# Allegro board AVRUSB500_2.brd
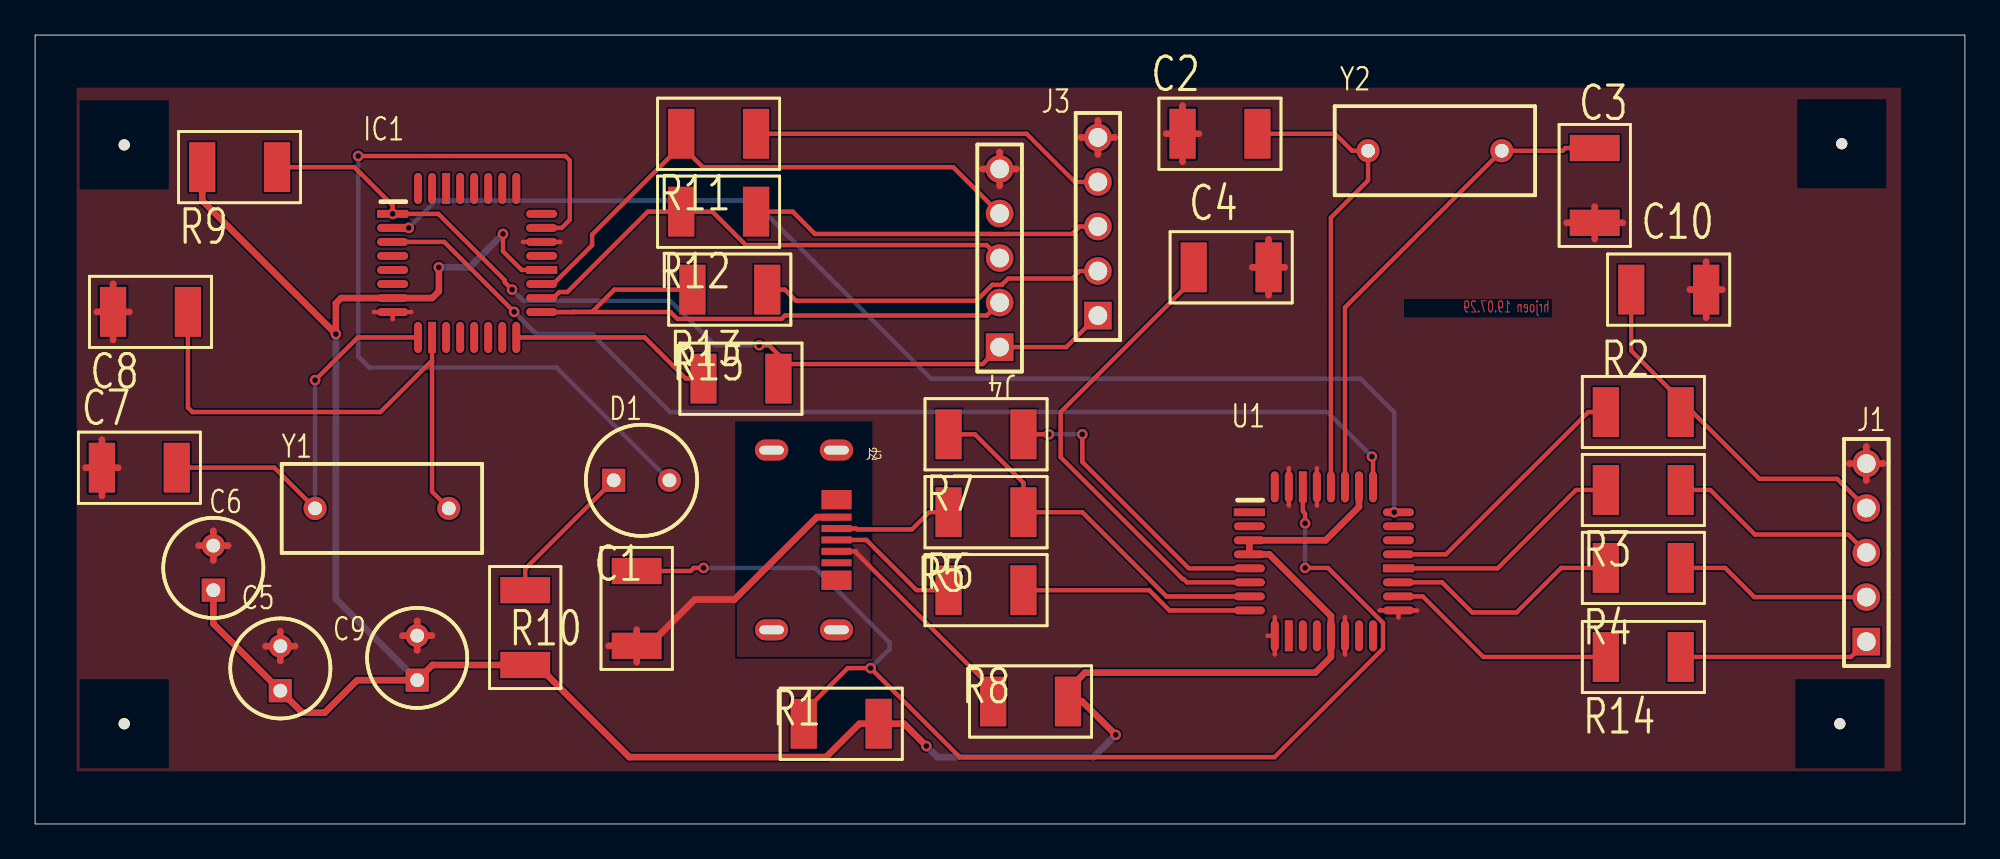
[diagram p0: board, top side]
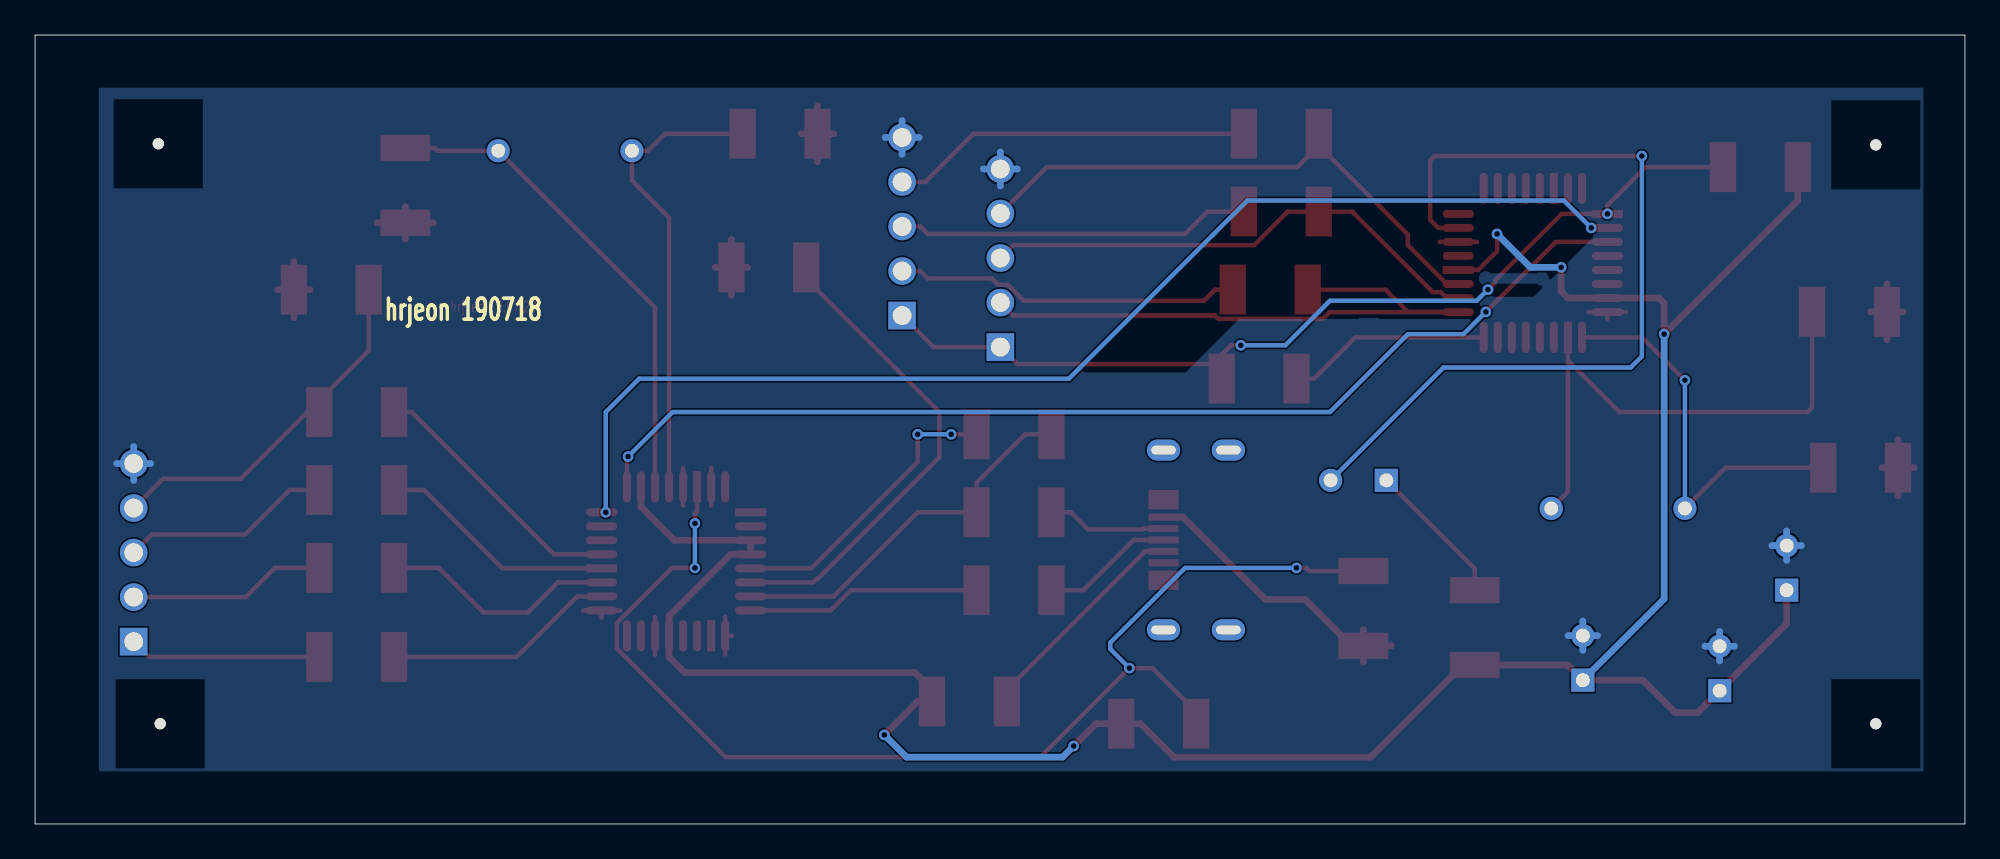
[diagram p1: board, bottom side, seen from below]

Outline 110 x 45 mm; copper layers: TOP, BOTTOM. Coordinates in mm from the lower left corner of the outline.
Outline path: 0,45 110,45 110,0 0,0 0,45

## Design rules (mm)
constraint set DEFAULT: min track width 0.254
net group POWERNETS: nets VCC

## Placement (name value [footprint] x y rotation side)
C1  47nF  [CPCYL1D225LS100031]  34.29 10.16 90 top
C2  27pF  [CPCYL1D225LS100031]  65.4 39.37 0 top
C3  27pF  [CPCYL1D225LS100031]  88.9 34.29 90 top
C4  47nF  [CPCYL1D225LS100031]  66.04 31.75 0 top
C5  100nF  [CPCYL1D225LS100031#2]  13.98 7.6 90 top
C6  1uF  [CPCYL1D225LS100031#2]  10.16 13.33 90 top
C7  100nF  [CPCYL1D225LS100031]  3.81 20.32 0 top
C8  100nF  [CPCYL1D225LS100031]  4.44 29.21 0 top
C9  100nF  [CPCYL1D225LS100031#2]  21.78 8.2 90 top
C10  22nF  [CPCYL1D225LS100031]  95.25 30.48 180 top
D1  LED  [CYLD250LS125031]  32.98 19.6 0 top
IC1  ATmega8  [QUAD80M32WG900]  20.38 34.8 270 top
J1  bbpg_Bitbang  [BLKCON100VHTM1SQSW1005]  104.38 10.4 90 top
J2  USBA  [MICRO_USB]  41.98 16.2 270 top
J3  avrusb500_out  [BLKCON100VHTM1SQSW1005]  60.58 29 90 top
J4  firmware_in  [BLKCON100VHTM1SQSW1005]  54.98 27.2 90 top
NOREF  -  [unnamed]  5.08 5.71 0 top
NOREF#2  -  [unnamed]  102.87 5.71 0 top
NOREF#3  -  [unnamed]  5.08 38.74 0 top
NOREF#4  -  [#2]  110 0 90 top
NOREF#5  -  [#2]  0 45 0 top
NOREF#6  -  [unnamed]  102.98 38.8 0 top
R1  470  [AX400X100031]  43.81 5.71 0 top
R2  220  [AX400X100031]  89.54 23.5 0 top
R3  220  [AX400X100031]  89.54 19.05 0 top
R4  220  [AX400X100031]  89.54 14.61 0 top
R5  27  [AX400X100031]  52.07 13.33 0 top
R6  27  [AX400X100031]  52.07 17.78 0 top
R7  1.5k  [AX400X100031]  52.07 22.23 0 top
R8  2.2  [AX400X100031]  54.61 6.99 0 top
R9  10k  [AX400X100031]  9.52 37.46 0 top
R10  470  [AX400X100031]  27.94 13.33 270 top
R11  1k  [AX400X100031]  36.83 39.37 0 top
R12  220  [AX400X100031]  36.83 34.93 0 top
R13  1k  [AX400X100031]  37.46 30.48 0 top
R14  220  [AX400X100031]  89.54 9.52 0 top
R15  220  [AX400X100031]  38.1 25.4 0 top
U1  FT232BM  [QUAD80M32WG900]  69.21 17.78 270 top
Y1  3.6864Mhz  [RAD450X200LS300031]  23.58 18 180 top
Y2  6Mhz  [RAD450X200LS300031]  75.98 38.4 0 top

## Library data of the parts
C1-C4 C7 C8 C10 = CAPACITOR NON-POL: alternate symbols: (SML2015)
C5 C9 = CAPACITOR NON-POL: alternate symbols: (SMDCAP)
C6 = CAPACITOR POL: alternate symbols: (SMDCAP)
D1 = LED
IC1 = ATmega8-DIL28_1
J1 J3 J4 = CON5
J2 = CON4_7
R1-R15 = R: alternate symbols: (SML2015)
U1 = FT232BM_2
Y1 Y2 = ZTA

## Footprints (pads in the part's own frame, mm; a bottom-side part is the same pattern mirrored in y, then rotated)
AX400X100031
  rect 1.499x2.845 smd: 1(0,0) 2(4.267,0)
BLKCON100VHTM1SQSW1005
  rect 1.575x1.575 hole 1.067: 1(0,0)
  round 1.575 hole 1.067: 2(2.54,0) 3(5.08,0) 4(7.62,0) 5(10.16,0)
CPCYL1D225LS100031
  rect 1.499x2.845 smd: 1(0,0) 2(4.267,0)
CPCYL1D225LS100031#2
  rect 1.321x1.321 hole 0.787: 1(0,0)
  round 1.321 hole 0.787: 2(2.54,0)
CYLD250LS125031
  rect 1.321x1.321 hole 0.787: 1(0,0)
  round 1.321 hole 0.787: 2(3.175,0)
MICRO_USB
  oval 1.2x1.9 hole 0.5x1.4: (-5.125,3.7) (-5.125,0) (5.125,3.7) (5.125,0)
  rect 1.1x1.72 smd: (-2.3,3.7) (2.3,3.7)
  rect 0.4x1.72 smd: 1(-1.3,3.7) 2(-0.65,3.7) 3(0,3.7) 4(0.65,3.7) 5(1.3,3.7)
QUAD80M32WG900
  rect 0.457x1.778 smd: 1(0,0) 20(3.2,8.496)
  oval 0.457x1.778 smd: 2(0.8,0) 3(1.6,0) 4(2.4,0) 5(3.2,0) 6(4,0) 7(4.801,0) 8(5.601,0) 17(5.601,8.496) 18(4.801,8.496) 19(4,8.496) 21(2.4,8.496) 22(1.6,8.496) 23(0.8,8.496) 24(0,8.496)
  oval 1.778x0.457 smd: 9(7.048,1.448) 11(7.048,3.048) 12(7.048,3.848) 13(7.048,4.648) 14(7.048,5.448) 15(7.048,6.248) 16(7.048,7.048) 25(-1.448,7.048) 26(-1.448,6.248) 27(-1.448,5.448) 28(-1.448,4.648) 29(-1.448,3.848) 31(-1.448,2.248) 32(-1.448,1.448)
  rect 1.778x0.457 smd: 10(7.048,2.248) 30(-1.448,3.048)
RAD450X200LS300031
  round 1.321 hole 0.787: 1(0,0) 2(7.62,0)
unnamed
  round 0.635 hole 3.175 unplated: (0,0)

## Nets
+5V: J2.4 R8.1
GND: C1.1 C2.1 C3.1 C4.2 C5.2 C6.2 C7.1 C8.1 C9.2 C10.1 IC1.8 IC1.22 J1.5 J2.1 J3.5 J4.5 U1.9 U1.14 U1.17 U1.29 U1.31
VCC: C5.1 C6.1 C9.1 IC1.7(VCC) IC1.20 R1.2 R8.2 R9.1 R10.2 U1.3 U1.4 U1.13 U1.26
BMISO: J1.3 R3.2
BMOSI: J1.2 R4.2
BRESET: J1.1 R14.2
BSCK: C10.2 J1.4 R2.2
D+: J2.2 R6.1
D-: J2.3 R5.1
F_MISO: IC1.18 J4.3 R12.1
F_MOSI: IC1.17 J4.2 R13.1
F_SCK: IC1.19 J4.4 R11.1
MISO: J3.3 R12.2
MOSI: J3.2 R13.2
RESET: IC1.1 J3.1 J4.1 R9.2 R15.2
RXD: IC1.2 U1.24
SCK: J3.4 R11.2
TXD: IC1.3 U1.25
N02483: R6.2 R7.1 U1.7
N02615: R5.2 U1.8
N03527: C4.1 U1.6
N06839: R2.1 U1.21
N06967: R3.1 U1.20
N07033: R4.1 U1.19
N07247: R14.1 U1.18
N11951: R7.2 U1.5
N15182: C7.2 IC1.9 Y1.2
N15289: C8.2 IC1.10 Y1.1
N19734: D1.2(CATHODE) IC1.23
N20572: D1.1 R10.1
N22544: IC1.16 R15.1
N41098: C3.2 U1.27 Y2.2
N41106: C2.2 U1.28(XTOUT) Y2.1
N49165: C1.2 R1.1 U1.30

Pads without a net: IC1 4 5 6 11 12 13 14 15 21 24 25 26 27 28 29 30 31 32; J2 5; U1 1 2 10 11 12 15 16 22 23 32

## Via types
v1: diameter 0.61, hole 0.33, TOP to BOTTOM, 20 vias

## Routing (per net, layer and track width the routed paths; a pad name or vN(x,y) marks a point on that pad's centre or on a via; arc(x,y) is an arc through that point)
+5V: length 12.9
  TOP w0.254: J2.4 46.79,15.55 46.79,15.47 54.61,7.66 R8.1
GND: length 107.7
  TOP w0.254: 73.06,20.3 U1.29 73.06,18.16 ; 70.66,9.67 70.66,10.73 ; 70.66,10.73 70.26,10.73 ; 70.66,10.73 70.66,11.8 ; IC1.8 21.45,29.2 ; IC1.8 20.38,28.79 ; IC1.8 19.31,29.2 ; 76.64,12.18 U1.17 ; U1.17 78.78,12.18 ; U1.17 77.71,11.77 ; 71.46,20.3 U1.31 71.46,18.16 ; 27.81,33.2 IC1.22 29.94,33.2 ; 74.66,11.8 U1.14 74.66,9.67
  TOP w0.381: J2.1 44.57,17.5 39.87,12.8 37.6,12.8 34.96,10.16 C1.1 ; C9.2 22.62,10.74 ; C9.2 21.78,11.58 ; C9.2 21.78,9.9 ; C9.2 20.94,10.74 ; 3.81,18.72 C7.1 ; C7.1 3.81,21.92 ; C7.1 2.88,20.32 ; C7.1 4.74,20.32 ; C3.1 88.9,35.22 ; C3.1 88.9,33.36 ; C3.1 90.5,34.29 ; C3.1 87.3,34.29 ; 3.52,29.21 C8.1 ; C8.1 4.44,27.61 ; C8.1 5.37,29.21 ; C8.1 4.44,30.81 ; C1.1 34.29,11.09 ; C1.1 32.69,10.16 ; C1.1 34.29,9.23 ; C6.2 11,15.88 ; C6.2 10.16,15.04 ; C6.2 10.16,16.71 ; C6.2 9.32,15.88 ; C2.1 65.4,40.97 ; C2.1 64.48,39.37 ; C2.1 65.4,37.77 ; C2.1 66.33,39.37 ; J1.5 104.38,21.53 ; J1.5 105.35,20.56 ; J1.5 103.41,20.56 ; J1.5 104.38,19.59 ; C5.2 13.98,10.98 ; C5.2 13.98,9.3 ; C5.2 13.14,10.14 ; C5.2 14.82,10.14 ; J4.5 54.98,38.33 ; J4.5 54.98,36.39 ; J4.5 54.01,37.36 ; J4.5 55.95,37.36 ; C4.2 71.23,31.75 ; C4.2 70.31,33.35 ; C4.2 69.38,31.75 ; C4.2 70.31,30.15 ; 95.25,28.88 C10.1 ; C10.1 95.25,32.08 ; C10.1 94.32,30.48 ; C10.1 96.18,30.48 ; 59.61,39.16 J3.5 ; J3.5 61.55,39.16 ; J3.5 60.58,40.13 ; J3.5 60.58,38.19
  BOTTOM w0.381: 104.38,19.59 J1.5 ; J1.5 104.38,21.53 ; J1.5 105.35,20.56 ; J1.5 103.41,20.56 ; C9.2 22.62,10.74 ; C9.2 21.78,11.58 ; C9.2 20.94,10.74 ; C9.2 21.78,9.9 ; J3.5 61.55,39.16 ; J3.5 59.61,39.16 ; J3.5 60.58,38.19 ; J3.5 60.58,40.13 ; 9.32,15.88 C6.2 ; C6.2 11,15.88 ; C6.2 10.16,15.04 ; C6.2 10.16,16.71 ; C5.2 14.82,10.14 ; C5.2 13.98,9.3 ; C5.2 13.14,10.14 ; C5.2 13.98,10.98 ; J4.5 54.98,38.33 ; J4.5 55.95,37.36 ; J4.5 54.01,37.36 ; J4.5 54.98,36.39
VCC: length 149.9
  TOP w0.254: v1(26.67,33.65) 26.67,32.66 27.73,31.6 IC1.20
  TOP w0.381: C6.1 10.16,11.42 C5.1 15.23,6.35 16.51,6.35 18.36,8.2 C9.1 22.65,9.07 R10.2 28.61,9.07 33.87,3.81 45.08,3.81 46.99,5.71 R1.2 49.53,5.71 v1(50.8,4.44) ; v1(61.59,5.08) 59.69,6.99 R8.2 58.88,7.66 59.85,8.63 72.97,8.63 73.86,9.53 U1.13 73.86,11.86 70.35,15.38 U1.4 U1.3 73.56,16.18 75.46,18.08 U1.26 ; v1(23.01,31.75) 23.01,30.38 22.63,30 IC1.7 17.45,30 17.14,29.7 v1(17.14,27.94) 9.52,35.56 R9.1
  BOTTOM w0.381: v1(23.01,31.75) 24.76,31.75 v1(26.67,33.65) ; v1(50.8,4.44) 51.44,3.81 60.32,3.81 v1(61.59,5.08) ; C9.1 17.14,12.83 v1(17.14,27.94)
BMISO: length 12.1
  TOP w0.254: J1.3 103.35,16.51 98.03,16.51 95.49,19.05 R3.2
BMOSI: length 11.3
  TOP w0.254: J1.2 98,12.94 96.33,14.61 R4.2
BRESET: length 10.9
  TOP w0.254: R14.2 103.5,9.52 J1.1
BSCK: length 21.3
  TOP w0.254: 93.8,24.17 R2.2 ; 93.8,24.17 98.29,19.69 102.71,19.69 J1.4 ; 93.8,24.17 90.98,26.99 C10.2
D+: length 6.8
  TOP w0.254: J2.2 46.79,16.85 46.84,16.8 49.98,16.8 50.96,17.78 R6.1
D-: length 7.6
  TOP w0.254: J2.3 47.38,16.2 50.25,13.33 R5.1
F_MISO: length 29.2
  TOP w0.254: IC1.18 29.54,30 29.88,30.34 30.34,30.34 34.93,34.93 R12.1 38.6,34.93 40.51,33.02 54.24,33.02 J4.3
F_MOSI: length 35.1
  TOP w0.254: 29.54,29.2 30.65,29.2 30.66,29.21 31.75,29.21 33.02,30.48 R13.1 ; 29.54,29.2 IC1.17 ; 29.54,29.2 31.98,29.2 36.21,29.2 36.61,28.8 42.55,28.8 42.75,29 54.24,29 J4.2
F_SCK: length 32
  TOP w0.254: R11.1 36.83,38.7 ; 36.83,38.7 38.06,37.46 52.33,37.46 J4.4 ; 36.83,38.7 31.75,33.62 31.75,33.01 29.54,30.8 IC1.19
MISO: length 20.2
  TOP w0.254: R12.2 43.18,34.93 44.45,33.65 54.49,33.65 54.5,33.65 55.46,33.65 55.47,33.65 59.11,33.65 59.54,34.08 J3.3
MOSI: length 19.8
  TOP w0.254: J3.2 59.54,31.54 59.11,31.12 55.47,31.12 55.11,30.75 54.56,30.75 53.65,29.85 43.37,29.85 42.74,30.48 R13.2
RESET: length 54.2
  TOP w0.254: v1(41.27,27.31) 41.83,27.31 42.37,26.77 42.37,26.07 ; R9.2 18.2,37.46 20.38,35.28 v1(20.38,34.8) 22.98,34.8 26.77,31.01 26.77,30.89 v1(27.19,30.48) ; J3.1 58.78,27.2 J4.1 54.01,26.23 42.53,26.23 42.37,26.07 ; 42.37,26.07 R15.2
  BOTTOM w0.254: v1(27.19,30.48) 27.82,29.85 36.19,29.85 38.73,27.31 v1(41.27,27.31)
RXD: length 68.4
  TOP w0.254: IC1.2 v1(21.3,34)
  BOTTOM w0.254: v1(21.3,34) 22.86,35.56 40.91,35.56 42.87,33.6 42.87,33.6 51.07,25.4 75.56,25.4 77.47,23.5 v1(77.47,17.78)
SCK: length 20.6
  TOP w0.254: J3.4 59.26,36.62 56.51,39.37 R11.2
TXD: length 62.6
  TOP w0.254: IC1.3 23.31,33.2 v1(27.31,29.21) ; v1(76.2,20.95) 76.26,20.89 U1.25
  BOTTOM w0.254: v1(76.2,20.95) 73.66,23.5 36.19,23.5 31.75,27.94 28.57,27.94 v1(27.31,29.21)
N02483: length 22
  TOP w0.254: U1.7 64.49,12.98 59.69,17.78 R6.2 56.34,19.46 53.57,22.23 R7.1
N02615: length 13.4
  TOP w0.254: R5.2 63.5,13.33 64.66,12.18 U1.8
N03527: length 27.7
  TOP w0.254: C4.1 66.04,31.08 58.46,23.5 58.46,20.92 65.4,13.97 65.47,13.97 65.66,13.78 U1.6
N06839: length 15.2
  TOP w0.254: U1.21 80.42,15.38 88.53,23.5 R2.1
N06967: length 13.7
  TOP w0.254: U1.20 83.36,14.58 87.83,19.05 R3.1
N07033: length 13.6
  TOP w0.254: R4.1 86.98,14.61 84.44,12.06 81.92,12.06 80.2,13.78 U1.19
N07247: length 13.3
  TOP w0.254: U1.18 79.1,12.98 82.55,9.52 R14.1
N11951: length 17
  TOP w0.254: v1(59.69,22.23) 59.69,20.65 65.76,14.58 U1.5 ; v1(57.78,22.23) R7.2
  BOTTOM w0.254: v1(59.69,22.23) v1(57.78,22.23)
N15182: length 23
  TOP w0.254: v1(15.96,25.31) 18.4,27.75 IC1.9 ; C7.2 13.64,20.32 Y1.2
  BOTTOM w0.254: Y1.2 v1(15.96,25.31)
N15289: length 30.8
  TOP w0.254: 22.63,26.44 19.69,23.5 8.97,23.5 8.71,23.75 C8.2 ; 22.63,26.44 IC1.10 ; 22.63,26.44 22.63,18.95 Y1.1
N19734: length 49.4
  TOP w0.254: v1(18.41,38.1) 30.23,38.1 30.48,37.85 30.48,34.46 30.02,34 IC1.23
  BOTTOM w0.254: D1.2 29.72,26.04 19.05,26.04 18.41,26.67 v1(18.41,38.1)
N20572: length 8.4
  TOP w0.254: R10.1 27.94,14.56 D1.1
N22544: length 11.6
  TOP w0.254: IC1.16 34.74,27.75 37.1,25.4 R15.1
N41098: length 28.2
  TOP w0.254: C3.2 87.22,38.56 87.07,38.4 Y2.2 74.66,29.46 U1.27
N41106: length 26.8
  TOP w0.254: U1.28 73.86,34.59 75.98,36.71 Y2.1 75.07,38.4 74.1,39.37 C2.2
N49165: length 69.5
  TOP w0.254: v1(72.39,17.14) 72.39,17.7 72.26,17.83 U1.30 ; C1.2 37.36,14.43 37.54,14.61 v1(38.1,14.61) ; v1(72.39,14.61) 73.69,14.61 76.83,11.46 76.83,10 70.65,3.81 52.7,3.81 v1(47.62,8.89) 46.32,8.89 43.81,6.39 R1.1
  BOTTOM w0.254: v1(72.39,14.61) v1(72.39,17.14) ; v1(47.62,8.89) 48.72,9.98 48.72,10.34 44.45,14.61 v1(38.1,14.61)

## Copper pours and planes (outline as drawn; the poured copper is in the pictures)
+5V on TOP: 40,22.86 40,9.52 47.62,9.52 47.62,22.86 ; 1 cut-out
GND on TOP: 2.37,3 2.37,42 106.36,42 106.36,3 ; 5 cut-outs
GND on BOTTOM: 2.37,3 2.37,42 106.36,42 106.36,3 ; 1 cut-out

## Text on the board
Ref Des/Silkscreen Bottom: hrjeon 190718
TOP: hrjoen 19.07.29
NCLEGEND-1-2: FIGURE | FINISHED_SIZE | 0.33 | 0.7869 | 1.0671 | 3.175 | 1.4x0.5001 | DRILL CHART: TOP to BOTTOM | ALL UNITS ARE IN MILLIMETERS | PLATED | NON-PLATED | QTY | 18 | 12 | 15 | 4
